# Altium PCB TAUV-Modem-Board.PcbDoc
Units mil, origin at the board's own origin, x right, y up, seen from the top; angles counter-clockwise.
Board outline 2755.91 x 2854.33 mil, 2 copper layers (Top Layer, Bottom Layer); 77 components, 54 nets, 230 pads, 47 vias.
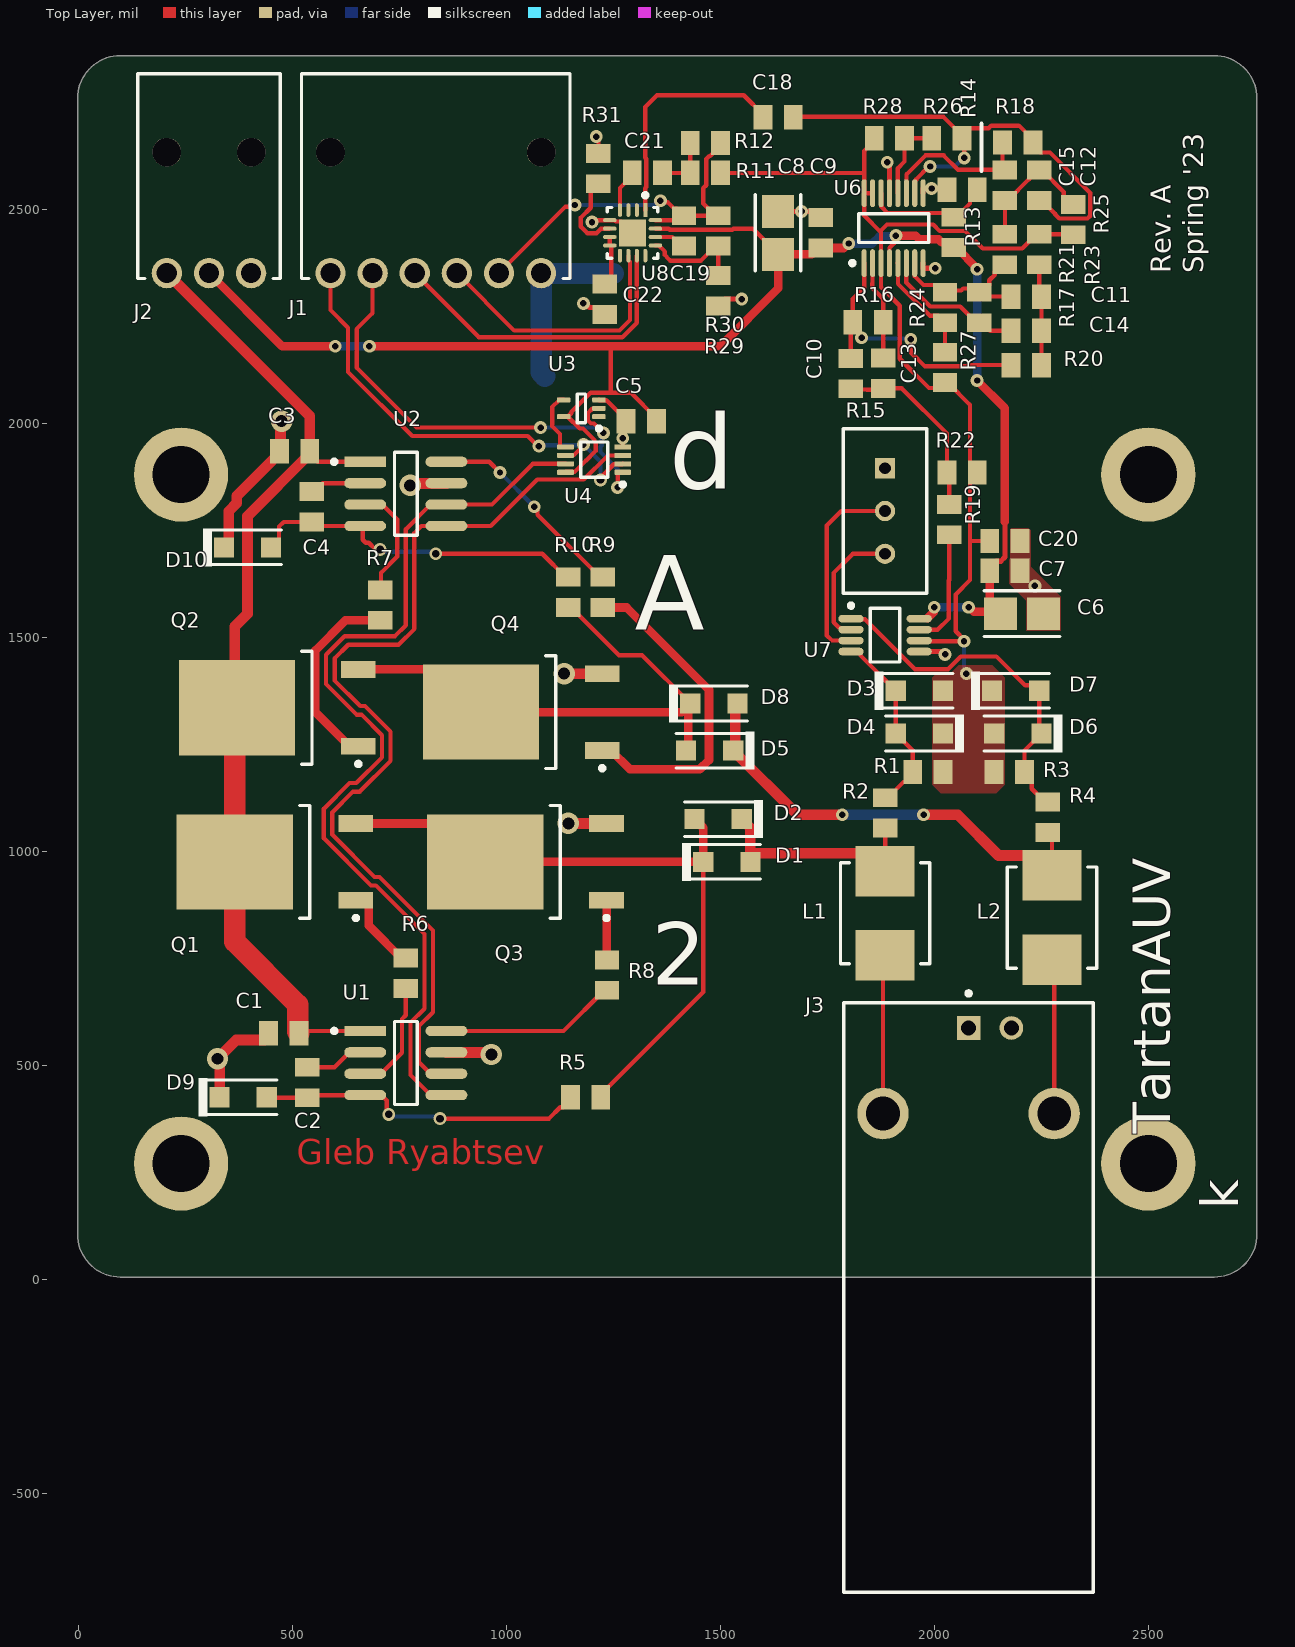
[diagram p0: Top Layer view]
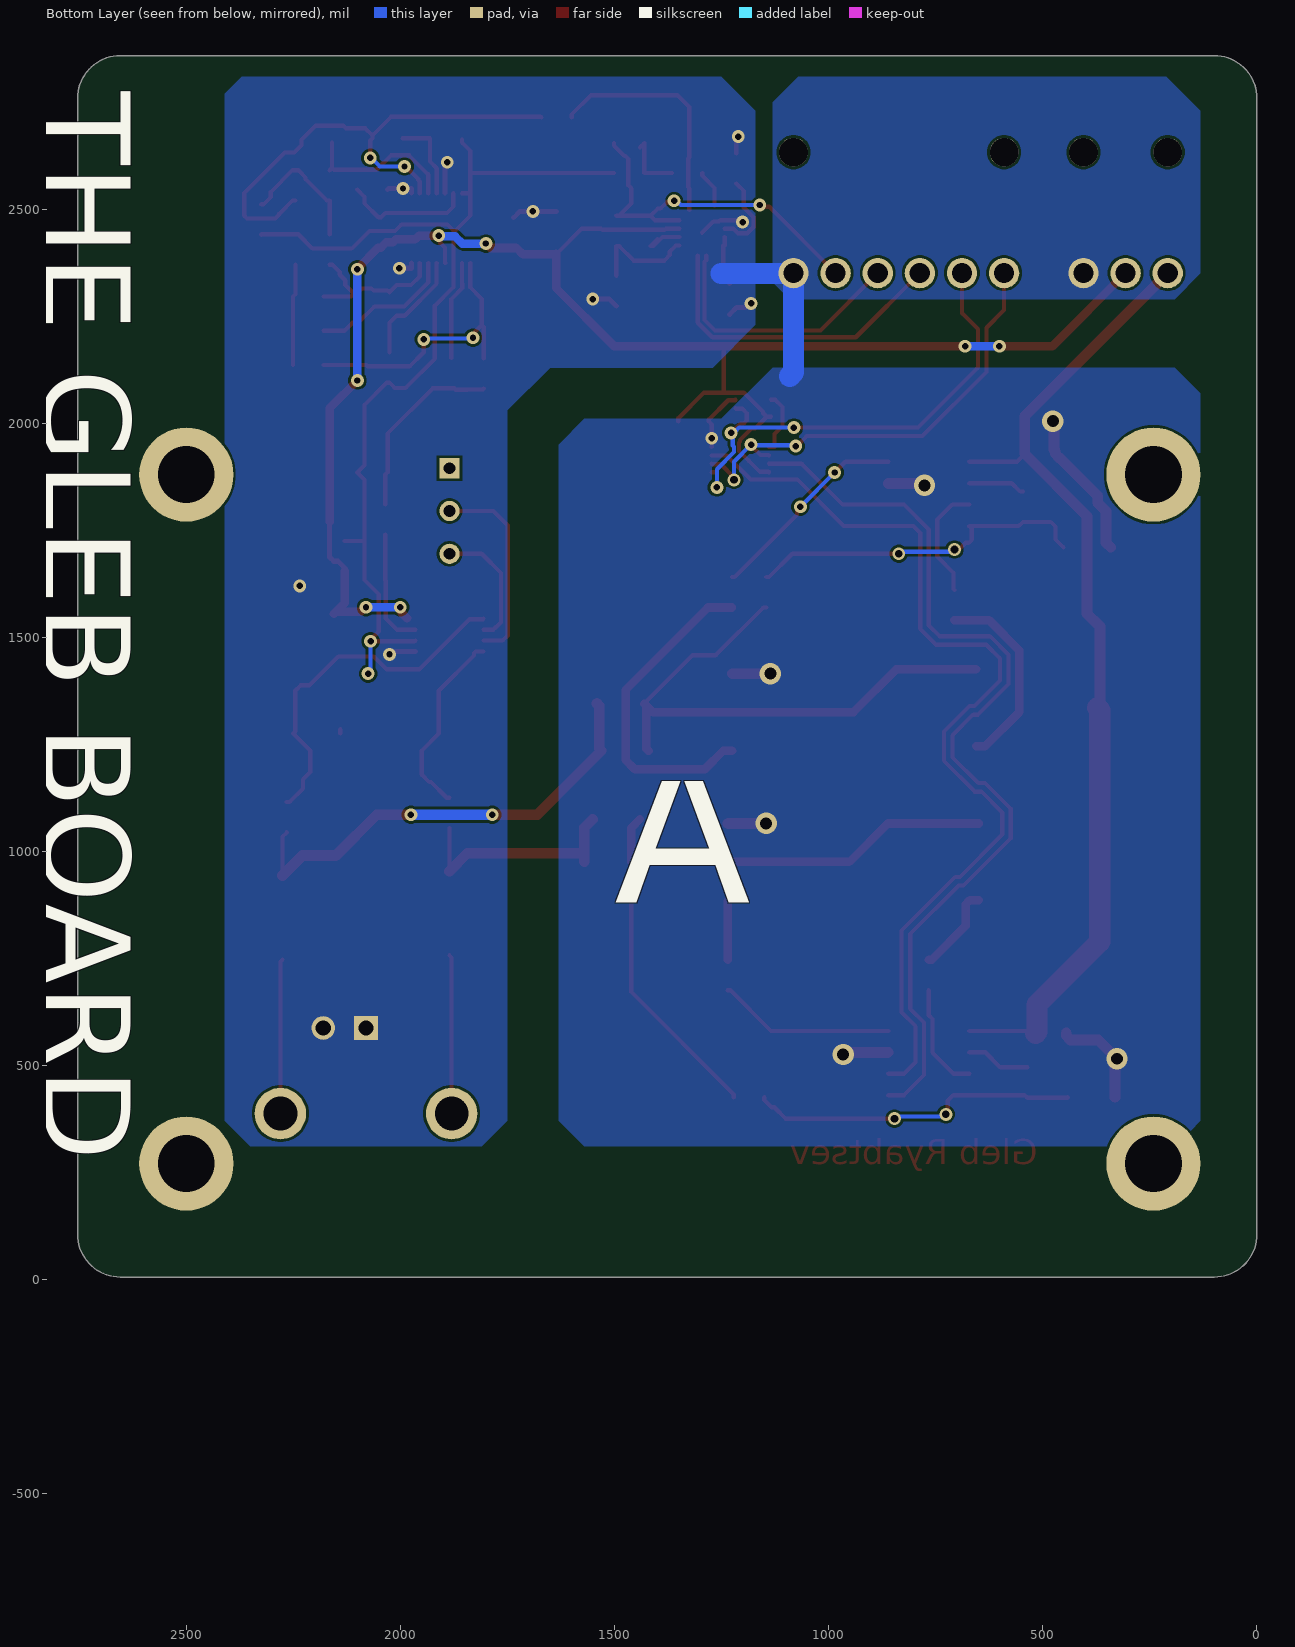
[diagram p1: Bottom Layer view, seen from below]

## Layer stack, top to bottom
Top Solder: solder mask 0.4, Solder Resist, Dk 3.5
Top Layer: signal copper 1.4
Dielectric 1: dielectric 12.6, FR-4, Dk 4.8
Bottom Layer: signal copper 1.4
Bottom Solder: solder mask 0.4, Solder Resist, Dk 3.5

## Board outline
-1.97,104.8 ccw(c98.03,104.8) 98.03,4.8 2653.94,4.8 ccw(c2653.94,104.8) 2753.94,104.8 2753.94,2759.13 ccw(c2653.94,2759.13) 2653.94,2859.13 98.03,2859.13 ccw(c98.03,2759.13) -1.97,2759.13

## Design rules (kind name [scope] priority, off if disabled: settings)
Clearance [All] p1: gap=6 ignorepadtopadclearanceinfootprint=TRUE except(0: Arc-Text Arc-Hole Track-Text Track-Hole SMDPad-Text SMDPad-Hole THPad-Text THPad-Hole Via-Text Via-Hole Fill-Text Fill-Hole Poly-Text Poly-Hole Region-Text Region-Hole Text-Text Text-Hole; 5: Arc-Arc Arc-Track Arc-SMDPad Track-Track Track-SMDPad SMDPad-SMDPad)
HoleSize [All] p1: absolutevalues=TRUE maxlimit=244.09 minlimit=7.87 maxpercent=80.000 minpercent=20.000
MinimumAnnularRing [All] p1: minimumring=6
MinimumSolderMaskSliver [All] p1: minsoldermaskwidth=2.95
PolygonConnect [All] p1: connectstyle=Direct reliefconductorwidth=10 reliefentries=4 polygonreliefangle="90 Angle" airgapwidth=10
RoomDefinition Main [InComponentClass('Main')] p1: confinementstyle=ConfineIn formatcopy=TRUE lockcomponents=FALSE outline -2250,-940 3840,-940 3840,3450 -2250,3450
RoomDefinition U_Tx [InComponentClass('U_Tx')] p2: confinementstyle=ConfineIn formatcopy=TRUE lockcomponents=FALSE outline -1020,-950 4120,-950 4120,3110 -1020,3110
RoomDefinition U_Rx [InComponentClass('U_Rx')] p3: confinementstyle=ConfineIn formatcopy=TRUE lockcomponents=FALSE outline -2060,-1170 4350,-1170 4350,3050 -2060,3050
RoutingVias [All] p1: holewidth=15 width=25 viastyle="Through Hole" minholewidth=12 minwidth=20 maxholewidth=28 maxwidth=50
SilkToSilkClearance [All] p1: silktosilkclearance=5
SilkToSolderMaskClearance [IsPad] p1: minsilkscreentomaskgap=5 clearancetoexposedcopper=TRUE
SolderMaskExpansion [All] p1: expansion=4 istentingtop=FALSE
Width [All] p1: maxlimit=50 minlimit=6 preferedwidth=10
26 further rules are at their usual default settings.

## Classes and differential pairs
component class U_Tx: C1 C2 C3 C4 C5 D9 D10 Q1 Q2 Q3 Q4 R5 R6 R7 R8 R9 R10 U1 U2 U3 U4
component class U_Rx: C6 C7 C8 C9 C10 C11 C12 C13 C14 C15 C18 C19 C20 C21 C22 R11 R12 R13 R14 R15 R16 R17 R18 R19 R20 R21 R22 R23 R24 R25 R26 R27 R28 R29 R30 R31 U6 U7 U8
component class Main: D1 D2 D3 D4 D5 D6 D7 D8 J1 J2 J3 L1 L2 R1 R2 R3 R4

## Components (designator, comment, footprint, x,y, rotation, side; value= is the part's Value field where it differs from the comment)
C1 "Capacitor" 0805 479.5,575 r0 top value=1u
C2 "Capacitor" 0805 535,459.5 r90 top value=1u
C3 "Capacitor" 0805 505,1935 r0 top value=1u
C4 "Capacitor" 0805 545,1805 r90 top value=1u
C5 "Capacitor" 0805 1315,2005 r0 top value=1u
C6 "C3216X5R1H106K160AB" FP-C3216-160-0_2-IPC_A 2205,1555 r0 top
C7 "Capacitor" 0805 2165,1655 r180 top value=0.1u
C8 "C3216X5R1H106K160AB" FP-C3216-160-0_2-IPC_A 1635,2445 r90 top
C9 "Capacitor" 0805 1735,2445 r270 top value=0.1u
C10 "Capacitor" 0805 1805,2116 r270 top value=330pF
C11 "Capacitor" 0805 2215,2296 r0 top value=300p
C12 "Capacitor" 0805 2245,2556 r90 top value=360p
C13 "Capacitor" 0805 1880.5,2117 r270 top value=330pF
C14 "Capacitor" 0805 2215,2216 r0 top value=300p
C15 "Capacitor" 0805 2165,2556 r270 top value=360p
C18 "Capacitor" 0805 1635,2715 r0 top value=19.6n
C19 "Capacitor" 0805 1415,2449.5 r90 top value=19.6n
C20 "Capacitor" 0805 2165,1725 r180 top value=0.1u
C21 "Capacitor" 0805 1329.5,2585 r0 top value=100n
C22 "Capacitor" 0805 1230,2290 r90 top value=100n
D1 "Diode" SOD-123F 1515,975 r0 top
D2 "Diode" SOD-123F 1495,1075 r180 top
D3 "Diode" SOD-123F 1965,1375 r0 top
D4 "Diode" SOD-123F 1965,1275 r180 top
D5 "Diode" SOD-123F 1475,1235 r180 top
D6 "Diode" SOD-123F 2195,1275 r180 top
D7 "Diode" SOD-123F 2190.12,1375 r0 top
D8 "Diode" SOD-123F 1485,1345 r0 top
D9 "Diode" SOD-123F 385,425 r0 top
D10 "Diode" SOD-123F 395.12,1710 r0 top
J1 "1053131106" "MOLEX 1053131106" 835,2595 r0 top
J2 "1053131103" "MOLEX 1053131103" 305,2595 r0 top
J3 "031-5540" FP-031-5540-MFG 2080,-43.03 r0 top
L1 "LQH55DN102M03L" FP-LQH55DN_03-MFG 1885,855 r90 top
L2 "LQH55DN102M03L" FP-LQH55DN_03-MFG 2275,845 r90 top
Q1 "IPD35N10S3L-26" INF-PG-TO252-3-11_M 459.49,975 r180 top
Q2 "IPD35N10S3L-26" INF-PG-TO252-3-11_M 465,1335 r180 top
Q3 "IPD35N10S3L-26" INF-PG-TO252-3-11_M 1045,975 r180 top
Q4 "IPD35N10S3L-26" INF-PG-TO252-3-11_M 1035,1325 r180 top
R1 "Resistor" 0805 1885,1089.5 r90 top value=100K
R2 "Resistor" 0805 1985,1185 r180 top value=1M
R3 "Resistor" 0805 2175,1185 r180 top value=1M
R4 "Resistor" 0805 2265,1079.5 r90 top value=100K
R5 "Resistor" 0805 1185,425 r0 top value=3
R6 "Resistor" 0805 765,715 r90 top value=10
R7 "Resistor" 0805 705,1575 r90 top value=10
R8 "Resistor" 0805 1235,710.5 r90 top value=10
R9 "Resistor" 0805 1225,1605 r90 top value=10
R10 "Resistor" 0805 1145,1605 r270 top value=3
R11 "Resistor" 0805 1465,2585 r0 top value=0
R12 "Resistor" 0805 1465,2655 r0 top value=0
R13 "Resistor" 0805 2045,2446 r270 top value=10k
R14 "Resistor" 0805 2065,2546 r0 top value=10k
R15 "3296W-1-503LF" FP-3296W-MFG 1885,1795 r180 top
R16 "Resistor" 0805 1845,2236 r180 top value=95.3k
R17 "Resistor" 0805 2105,2270.5 r90 top value=97.6k
R18 "Resistor" 0805 2195,2656 r0 top value=95.3k
R19 "Resistor" 0805 2035,1775 r90 top value=48.7k
R20 "Resistor" 0805 2215,2136 r0 top value=48.7k
R21 "Resistor" 0805 2165,2406 r90 top value=48.7k
R22 "Resistor" 0805 2065,1885 r180 top value=986
R23 "Resistor" 0805 2245,2406 r270 top value=1K
R24 "Resistor" 0805 2025,2270.5 r90 top value=13.3k
R25 "Resistor" 0805 2325,2476 r90 top value=976
R26 "Resistor" 0805 2029.5,2666 r0 top value=14.3k
R27 "Resistor" 0805 2025,2130.5 r90 top value=133
R28 "Resistor" 0805 1895,2666 r0 top value=143
R29 "Resistor" 0805 1495,2449.5 r90 top value=10k
R30 "Resistor" 0805 1495,2309.5 r90 top value=10k
R31 "Resistor" 0805 1215,2595 r270 top value=10k
U1 "MIC4604YM-TR" FP-SOICN-8LD-PL-1-IPC_A 765,505 r0 top
U2 "MIC4604YM-TR" FP-SOICN-8LD-PL-1-IPC_A 765,1835 r0 top
U3 "SN74AHC1G04DRLR" DRL0005A_M 1175,2035 r180 top
U4 "SN74LVC2G08DCUR" DCU0008A_M 1205,1915 r180 top
U6 "LTC6257CMS#PBF" LT-MS-16_N 1905,2456 r90 top value=48.7kR
U7 "AD8221ARMZ-R7" ADI-RM-8_L 1885,1505 r0 top
U8 "AD8338ACPZ-R7" FP-CP-16-22-IPC_C 1295,2445 r270 top value=48.7kR

## Footprints (in the part's own frame and the unit in brackets; to place one, negate y for a bottom-side part, rotate by r counter-clockwise, add the part's x,y. Pads: shape width x height; smd on the part's side, far side on the other; paste and mask are expansions set on the pad)
0805 [mil]
  rect 44x57 smd: 1(-35.5,0) 2(35.5,0)
  body extent 0,0 10,10, height 10
ADI-RM-8_L [mm] "SOP, 8-Leads, Body 3x3mm, Pitch 0.65mm, IPC High Density"
  oval 1.5x0.45 smd: 1(-2.025,0.975) 2(-2.025,0.325) 3(-2.025,-0.325) 4(-2.025,-0.975) 5(2.025,-0.975) 6(2.025,-0.325) 7(2.025,0.325) 8(2.025,0.975)
  silkscreen extent -2.15,-1.6 0.87,1.87, body extent -1.6,-1.6 1.6,1.6, height 1.1
DCU0008A_M [mm] "SOP, 8-Leads, Body 2.4x2.1mm, Pitch 0.5mm, IPC Low Density"
  rrect33% 1x0.3 smd: 1(-1.7,0.75) 2(-1.7,0.25) 3(-1.7,-0.25) 4(-1.7,-0.75) 5(1.7,-0.75) 6(1.7,-0.25) 7(1.7,0.25) 8(1.7,0.75)
  silkscreen extent -1.83,-1.05 0.8,1.6, body extent -1.56,-1 1.56,1, height 0.9
DRL0005A_M [mm] "SOT23, 5-Leads, Body 1.7x1.3mm, Pitch 0.5mm, IPC Low Density"
  rrect33% 0.8x0.3 smd: 1(-1.05,0.5) 2(-1.05,0) 3(-1.05,-0.5) 4(1.05,-0.5) 5(1.05,0.5)
  silkscreen extent -1.18,-0.85 0.25,1.32, body extent -0.65,-0.85 0.65,0.85, height 0.6
FP-031-5540-MFG [mm]
  rect 1.4x1.4 hole 0.9 paste-1000 mask+0: 1(0,16)
  round 1.4 hole 0.9 paste-1000 mask+0: 2(2.54,16)
  round 3.05 hole 2 paste-1000 mask+0: 3(-5.08,10.92) 4(5.08,10.92)
  silkscreen extent -7.4,-17.5 7.4,18.17, body extent -7.5,-17.6 7.5,17.6, height 0.25
FP-3296W-MFG [mm]
  rect 1.2x1.2 hole 0.7 paste-1000 mask+0: 1(0.005,-2.54)
  round 1.2 hole 0.7 paste-1000 mask+0: 2(0.005,0) 3(0.005,2.54)
  silkscreen extent -2.48,-4.89 2.48,4.89, body extent -2.58,-4.99 2.58,4.99, height 0.25
FP-C3216-160-0_2-IPC_A [mil]
  rect 76.93x75.05 smd paste+0 mask+0: 1(-50.24,0) 2(50.24,0)
  silkscreen extent -89,-53 89,53, body extent -108,-57 108,57, height 10
FP-CP-16-22-IPC_C [mm]
  rect 0.806x0.239 smd paste+0 mask+0: 1(-1.353,0.75)
  rrect100% 0.806x0.239 smd paste+0 mask+0: 2(-1.353,0.25) 3(-1.353,-0.25) 4(-1.353,-0.75) 9(1.353,-0.75) 10(1.353,-0.25) 11(1.353,0.25) 12(1.353,0.75)
  rrect100% 0.239x0.806 smd paste+0 mask+0: 5(-0.75,-1.353) 6(-0.25,-1.353) 7(0.25,-1.353) 8(0.75,-1.353) 13(0.75,1.353) 14(0.25,1.353) 15(-0.25,1.353) 16(-0.75,1.353)
  rect 1.6x1.6 smd paste-1000 mask+0: 17(0,0)
  silkscreen extent -2.36,-1.5 1.5,1.5, body extent -1.86,-1.86 1.86,1.86, height 0.25
FP-LQH55DN_03-MFG [mm]
  rect 3x3.5 smd paste+0 mask+0: 1(-2.5,0) 2(2.5,0)
  silkscreen extent -3,-2.65 3,2.65, body extent -4.1,-2.75 4.1,2.75, height 0.25
FP-SOICN-8LD-PL-1-IPC_A [mil]
  rect 97.79x23.89 smd paste+0 mask+0: 1(-94.92,75)
  rrect100% 97.79x23.89 smd paste+0 mask+0: 2(-94.92,25) 3(-94.92,-25) 4(-94.92,-75) 5(94.92,-75) 6(94.92,-25) 7(94.92,25) 8(94.92,75)
  silkscreen extent -172,-97 26,97, body extent -164,-117 164,117, height 10
INF-PG-TO252-3-11_M [mm] "DPAK, 3-Leads, Body 6.5x6.12mm, Pitch 2.28mm, IPC Low Density"
  rect 2.05x1 smd: 1(-4.8,2.28) 3(-4.8,-2.28)
  rect 6.9x5.65 smd: 2(2.4,0)
  silkscreen extent -4.93,-3.35 -1.45,3.45, body extent -2.05,-3.32 4.17,3.32, height 2.35
LT-MS-16_N [mm] "SOP, 16-Leads, Body 4.04x3.00mm, Pitch 0.50mm, IPC Medium Density"
  oval 1.65x0.3 smd: 1(-2.075,1.75) 2(-2.075,1.25) 3(-2.075,0.75) 4(-2.075,0.25) 5(-2.075,-0.25) 6(-2.075,-0.75) 7(-2.075,-1.25) 8(-2.075,-1.75) 9(2.075,-1.75) 10(2.075,-1.25) 11(2.075,-0.75) 12(2.075,-0.25) 13(2.075,0.25) 14(2.075,0.75) 15(2.075,1.25) 16(2.075,1.75)
  silkscreen extent -2.2,-2.08 0.85,2.57, body extent -1.55,-2.05 1.55,2.05, height 1.1
"MOLEX 1053131103" [mm] "Connector Header Through Hole, Right Angle 3 position, 2mm Pitch, 8.44x8.64 mm Body"
  round 1.8 hole 1.2: 1(-2.5,-6.2) 2(0,-6.2) 3(2.5,-6.2)
  round 1.7 hole 1.7: SH(-2.5,0.98) SH(2.5,0.98)
  silkscreen extent -4.22,-6.52 4.22,5.64, body extent -4.22,-6.52 4.22,5.64, height 6.64
"MOLEX 1053131106" [mm] "Connector Header Through Hole, Right Angle 6 position, 2mm Pitch, 15.94x8.64 mm Body"
  round 1.8 hole 1.2: 1(-6.25,-6.2) 2(-3.75,-6.2) 3(-1.25,-6.2) 4(1.25,-6.2) 5(3.75,-6.2) 6(6.25,-6.2)
  round 1.7 hole 1.7: SH(-6.25,0.98) SH(6.25,0.98)
  silkscreen extent -7.97,-6.52 7.97,5.64, body extent -7.97,-6.52 7.97,5.64, height 6.64
SOD-123F [mm]
  rect 1.2x1.2 smd paste-0.05 mask+0.051: 1(-1.4,0) 2(1.4,0)
  silkscreen extent -2.64,-1.12 2.01,1.12, body extent 0,0 0.25,0.25, height 0.25

## Part data
C6 C8: library part CMP-2000-06045-2, "Multilayer Ceramic Capacitors 10uF ±10% 50V X5R SMD 1206", Capacitance=10uF, Case Code (Imperial)=1206, Case Code (Metric)=3216, Dielectric=X5R, Dielectric Material=Ceramic, Max Operating Temperature=85°C, Min Operating Temperature=-55°C, Package Quantity=1, Tolerance=10%, Voltage=50V, Case/Package=1206, Construction=Flat, Depth=1.6mm, Height=1.6mm, Lead Free="Lead Free", Length=3.2mm, Mount="Surface Mount", Packaging="Tape and Reel", Radiation Hardening=No, REACH SVHC="No SVHC", Resistor Type=Ceramic, RoHS Compliant=Yes, Series=C, Termination=SMD/SMT, Thickness=0.071inch, Voltage Rating=50V, Voltage Rating (DC)=50V, Weight=0.000571oz, Width=0.063inch
J1: "CONN HEADER R/A 6POS 2.5MM", Insulation Color=Black, Manufacturer=Molex, Operating Temperature="-40°C ~ 105°C", Supplier Part Number 1=WM16897-ND, ComponentLink1Description=Datasheet, ComponentLink1URL=https://www.molex.com/pdm_docs/ps/PS-105300-100-001.pdf, ComponentLink2Description="DigiKey Link", ComponentLink2URL=https://www.digikey.com/en/products/detail/molex/1053131106/7693178, Connector Type=Header, Contact Finish - Mating=Tin, Contact Finish - Post=Tin, Contact Finish Thickness - Mating="59.0µin (1.50µm)", Contact Length - Post="0.126\" (3.20mm)", Contact Material=Brass, Contact Shape=Square, Contact Type="Male Pin", Fastening Type="Latch Holder", Features="Board Guide", Insulation Height="0.149\" (3.78mm)", Insulation Material="Liquid Crystal Polymer (LCP)", LastUpdated="8/11/2022 9:49:49 AM", Lifecycle Status=Active, Minimum Order=1, Mounting Type="Through Hole, Right Angle", Number of Positions=6, Number of Positions Loaded=All, Number of Rows=1, Packaging=Tray, Part Number=1053131106, Part Status=Active, PartId=145, Pitch - Mating="0.098\" (2.50mm)", Price=0.75, Row Spacing - Mating="-40°C ~ 105°C", Series="Nano-Fit 105313", Shrouding="Shrouded - 4 Wall", Style="Board to Cable/Wire", Supplier 1=DigiKey, Termination=Solder
J2: "CONN HEADER R/A 3POS 2.5MM", Insulation Color=Black, Manufacturer=Molex, Operating Temperature="-40°C ~ 105°C", Supplier Part Number 1=WM16894-ND, ComponentLink1Description=Datasheet, ComponentLink1URL=http://www.literature.molex.com/SQLImages/kelmscott/Molex/PDF_Images/987651-1223.PDF, ComponentLink2Description="DigiKey Link", ComponentLink2URL=http://digikey.com/product-detail/en/molex/1053131103/WM16894-ND/7693175, Connector Type=Header, Contact Finish - Mating=Tin, Contact Finish - Post=Tin, Contact Finish Thickness - Mating="59.0µin (1.50µm)", Contact Length - Post="0.126\" (3.20mm)", Contact Material=Brass, Contact Shape=Square, Contact Type="Male Pin", Fastening Type="Latch Holder", Features="Board Guide", Insulation Height="0.149\" (3.78mm)", Insulation Material="Liquid Crystal Polymer (LCP)", LastUpdated="8/11/2022 9:48:02 AM", Lifecycle Status=Active, Minimum Order=1, Mounting Type="Through Hole, Right Angle", Number of Positions=3, Number of Positions Loaded=All, Number of Rows=1, Packaging=Tray, Part Number=1053131103, Part Status=Active, PartId=142, Pitch - Mating="0.098\" (2.50mm)", Price=0.95, Row Spacing - Mating="-40°C ~ 105°C", Series="Nano-Fit 105313", Shrouding="Shrouded - 4 Wall", Style="Board to Cable/Wire", Supplier 1=DigiKey, Termination=Solder
J3: library part CMP-20040-000002-1, "CONN BNC RCPT R/A 50 OHM PCB", Dielectric Material=Polypropylene, Frequency=1GHz, Manufacturer="Amphenol RF", Package=0, Temperature="-55°C to +85°C", Temperature Range High=+85°C, Temperature Range Low=-55°C, Automotive=No, Category=Conn, ComponentLink2Description=Datasheet, ComponentLink2URL=https://www.amphenolrf.com/downloads/dl/file/id/2040/product/579/031_5540_customer_drawing.pdf, Conn Orientation="Right Angle", Contact Material=Gold,Nickel, Device Class L1=Connectors, Device Class L2="RF / Coaxial Connectors", Device Class L3=unset, Digikey Description="CONN BNC RCPT R/A 50 OHM PCB", Height=13.4mm, Impedance=50Ω, Is Female=yes, Lead Free=Yes, Manufacturer Part Number=031-5540, Number Of Contacts=2, Octopart=https://octopart.com/031-5540-amphenol+rf-49742301, Pitch=2.54mm, RoHS=TRUE
L1 L2: library part CMP-06042-004467-1, "Wire Wound Ferrite Inductor for Power Lines 1000μH ±20% 14.42Ω  0.15A 2220", Case Code (Imperial)=2220, Case Code (Metric)=5750, Current Rating=150mA, DC Resistance (DCR)=10.3R, Inductance=1mH, Max Operating Temperature=80°C, Min Operating Temperature=-40°C, Package Quantity=350, Resistor Type=Wirewound, Self Resonant Frequency=1.7MHz, Test Frequency=10kHz, Tolerance=20%, Case/Package=2220, Core Material=Ferrite, DC Current=150mA, Depth=5.3mm, Height=0.197inch, Height - Seated (Max)=0.198inch, Lead Free="Lead Free", Length=0.224inch, Max DC Current=150mA, Military Standard=Not, Mount="Surface Mount", Packaging="Tape and Reel", Radiation Hardening=No, Series Resistance=10.3R, Shielding=Unshielded, Termination=SMD/SMT, Weight=0.016932oz, Width=0.197inch
Q1 Q2 Q3 Q4: library part CMP-1138-00144-1, "OptiMOS-T Power-Transistor, 100 V VDS, 35 A ID, PG-TO252-3-11, Reel, Green", Manufacturer=Infineon, ComponentLink1Description="Manufacturer URL", ComponentLink1URL=http://www.infineon.com/, ComponentLink2Description=Datasheet, ComponentLink2URL=http://www.infineon.com/dgdl/IPD35N10S3L-26_DS_1_1.pdf?folderId=db3a3043156fd5730115c7d50620107c&fileId=db3a30431a5c32f2011a9085629c594b&location=en.Products.Automotive_ICs.Automotive_MOSFETs.Single__N-Channel_100V_MOSFETs.DATASHEET.IPD35N10S3L-26_DS_1_1.p, ComponentLink3Description="Package Specification", ComponentLink3URL=http://www.infineon.com/dgdl/BTS142_DS_13.pdf?folderId=db3a3043163797a6011667aa084c0e01&fileId=db3a3043163797a6011667ac98be0e02&location=en.Products.Automotive_ICs.Smart_High-_and_Low-Side_Switches.HITFET___TEMPFET__-_Smart_Low-Side_Switches.DATASHEET.BTS1, DatasheetVersion=Rev.1.1, Green=TRUE, Halogen-free=TRUE, ID (max)="35 A", IDpuls (max)="140 A", Mounting Technology="Surface Mount", PackageDescription="3-Pin Plastic (Green) Transistor Single Outline Package, 6.5 x 6.12 mm Body, 2.28 mm Pitch", PackageReference=PG-TO252-3-11, PackageVersion=Dec-06, Packing=Reel, PartNumber=IPD35N10S3L-26, Ptot (max)="71 W", QG="39 nC", RDS (on) (max) (@4.5V)="31.9 mOhm", RDS (on) (max) (@10V)="24 mOhm", RthJC (max)="2.1 K/W", Technology=OptiMOS-T, VDS (max)="100 V", VGS(th) (max)="2.4 V", VGS(th) (min)="1.2 V"
R15: library part CMP-07234-000043-1, "TRIMMER 50K OHM 0.5W PC PIN TOP", Color=Blue, Insulation Resistance=1GR, Manufacturer Series=3296, Max Operating Temperature=125°C, Max Power Dissipation=500mW, Min Operating Temperature=-55°C, Package Quantity=50, Resistance=50kR, Resistance Law=Linear, Resistance Tolerance=10%, Resistor Type=Cermet, Temperature Coefficient=100ppm/°C, Actuator Orientation=Vertical, Actuator Type=SCREW, Contact Plating=Tin, Depth=4.83mm, Height=0.395inch, Lead Free="Lead Free", Length=9.53mm, Military Standard=Not, Mount=Panel, Number of Pins=3, Number of Terminals/Pins=3, Number of Turns=25, Packaging=Rail/Tube, Power Rating=500mW, Radiation Hardening=No, REACH SVHC="No SVHC", RoHS Compliant=Yes, Series=3296, Taper=Linear, Technology=CERMET, Terminal Finish=Tin, Termination=Pin, Tolerance=10%, Type=Potentiometer, Weight=0.03oz, Width=9.53mm
R19 R20: "Fixed Resistor, Metal Glaze/thick Film, 0.125W, 48700ohm, 150V, 1% +/-Tol, 100ppm/Cel, Surface Mount, 0805", Case/Package=0805, Manufacturer=Panasonic, Manufacturer Part Number=ERJ-6ENF4872V, Max Operating Temperature=155°C, Min Operating Temperature=-55°C, Package Height=0.6mm, Package Length=2mm, Package Shape=Rectangular, Package Style=SMTMeter, Package Width=1.25mm, Power=125mW, Rated Temperature=70°C, Resistor Type="FIXED RESISTOR", Supplier Part Number=667-ERJ-6ENF4872V, Temperature Coefficient=100ppm/°C, Tolerance=1%, Working Voltage=150V, Category="Chip SMD Resistors", ComponentLink1Description=https://datasheet.ciiva.com:443/pdfs/VipMasterIC/IC/PANA/PANA-S-A0009889626/PANA-S-A0009889626-1.pdf?src-supplier=IHS+Markit, ComponentLink1URL=https://datasheet.ciiva.com:443/pdfs/VipMasterIC/IC/PANA/PANA-S-A0009889626/PANA-S-A0009889626-1.pdf?src-supplier=IHS+Markit, ComponentLink2Description=https://datasheet.ciiva.com/9189/aoa0000ce2-9189241.pdf?src-supplier=Avnet, ComponentLink2URL=https://datasheet.ciiva.com/9189/aoa0000ce2-9189241.pdf?src-supplier=Avnet, ComponentLink3Description=https://datasheet.ciiva.com/46420/1678782-46420077.pdf?src-supplier=Element14, ComponentLink3URL=https://datasheet.ciiva.com/46420/1678782-46420077.pdf?src-supplier=Element14, ComponentLink4Description=https://datasheet.ciiva.com/22668/1678782-22668698.pdf?src-supplier=Element14, ComponentLink4URL=https://datasheet.ciiva.com/22668/1678782-22668698.pdf?src-supplier=Element14, ComponentLink5Description=https://datasheet.ciiva.com/24063/aoa0000ce2-24063086.pdf?src-supplier=Mouser, ComponentLink5URL=https://datasheet.ciiva.com/24063/aoa0000ce2-24063086.pdf?src-supplier=Mouser, Construction=Rectangular, JESD-609 Code=e3, Mounting Technology="Surface Mount", Packaging="Tape and Reel", Pins=2, Pricing="1=0.11000, 10=0.08900, 50=0.08900, 100=0.03500, 1000=0.01600, 10000=0.01100 (USD)", Reach SVHC Compliant=Yes, Reference Standard=AEC-Q200, RoHS=Yes, RoHS Compliant=Yes, SimulationGenericComponent=True, Stock=62583, Supplier=Mouser, TC1=0, TC2=0, Technology="METAL GLAZE/THICK FILM", Terminal Finish=Nickel, Termination=Wraparound
U1 U2: library part CMP-06319-000039-1, "IC GATE DRVR HALF-BRIDGE 8SOIC", Case/Package=SOIC, Max Operating Temperature=125°C, Max Output Current=1A, Max Supply Voltage=16V, Min Operating Temperature=-40°C, Min Supply Voltage=5.5V, Nominal Supply Current=48uA, Operating Supply Voltage=12V, Package Quantity=2500, Channel Type=Independent, Fall Time=20ns, Lead Free="Lead Free", Mount="Surface Mount", Number of Drivers=2, Number of Outputs=1, Number of Pins=8, Packaging="Tape and Reel", Rise Time=20ns, RoHS Compliant=Yes, Series=-, Supply Current=48uA, Turn-Off Delay Time=75ns, Turn-On Delay Time=75ns
U3: library part CMP-0859-00797-3, "Single Inverter Gate, DRL0005A, LARGE T&R", F @ Nom Voltage(Max)(Mhz)=75, Generic Part Number=SN74AHC1G04, ICC @ Nom Voltage(Max)(mA)=0.01, Manufacturer="Texas Instruments", Operating Temperature Range(C)="-40 to 125", Rating=Catalog, tpd @ Nom Voltage(Max)(ns)=10.6,7.5, Voltage(Nom)(V)=3.3,5, 3-State Output=No, Bits(#)=1, DatasheetVersion=SCLS318S, Input Type=CMOS, Logic=Inverting, Output Drive (IOL/IOH)(Max)(mA)=50/-50, Output Type=CMOS, PackageReference=DRL0005A, Schmitt Trigger=No, Sub-Family="Inverting Buffer/Driver", Technology Family=AHC, VCC(Max)(V)=5.5, VCC(Min)(V)=2
U4: library part CMP-0859-00670-3, "Dual 2-Input Positive-AND Gate, DCU0008A, LARGE T&R", F @ Nom Voltage(Max)(Mhz)=150, Generic Part Number=SN74LVC2G08, ICC @ Nom Voltage(Max)(mA)=0.01, Manufacturer="Texas Instruments", Operating Temperature Range(C)="-40 to 125,-40 to 85", Rating=Catalog, tpd @ Nom Voltage(Max)(ns)=9.8,5.8,5.3,4.8, Voltage(Nom)(V)=1.8,2.5,3.3,5, 3-State Output=No, Bits(#)=2, DatasheetVersion=SCES198M, Gate Type=AND, Input Type=CMOS/TTL, Logic=True, Output Drive (IOL/IOH)(Max)(mA)=32/-32, Output Type=CMOS, PackageReference=DCU0008A, Schmitt Trigger=No, Sub-Family="AND Gate", Technology Family=LVC, VCC(Max)(V)=5.5, VCC(Min)(V)=1.65
U6: library part CMP-0359-00487-2, "Quad Channel, Power Efficient Operational Amplifier, RRIO, 6.5 MHz Typical GBW, 1.8 V/us Typical SR, 1.8 to 5.25 V, 16-Pin SOP (MS16), Commercial, Pb-Free", Case/Package=0805, Linear Technology Part Number=LTC6257, Manufacturer="Linear Technology", Manufacturer Part Number=ERJ-6ENF4872V, Max Operating Temperature=155°C, Min Operating Temperature=-55°C, Package Height=0.6mm, Package Length=2mm, Package Shape=Rectangular, Package Style=SMTMeter, Package Width=1.25mm, Power=125mW, Rated Temperature=70°C, Resistor Type="FIXED RESISTOR", Supplier Part Number=667-ERJ-6ENF4872V, Temperature Coefficient=100ppm/°C, Tolerance=1%, Working Voltage=150V, Category="Chip SMD Resistors", Channels (#)=4, ComponentLink1Description="Manufacturer URL", ComponentLink1URL=http://www.linear.com/, ComponentLink2Description=Datasheet, ComponentLink2URL=http://cds.linear.com/docs/en/datasheet/625567fb.pdf, ComponentLink3Description="Package Specification", ComponentLink3URL=http://cds.linear.com/docs/en/packaging/MSOP_16_05-08-1669.pdf, ComponentLink4Description=https://datasheet.ciiva.com:443/pdfs/VipMasterIC/IC/PANA/PANA-S-A0009889626/PANA-S-A0009889626-1.pdf?src-supplier=IHS+Markit, ComponentLink4URL=https://datasheet.ciiva.com:443/pdfs/VipMasterIC/IC/PANA/PANA-S-A0009889626/PANA-S-A0009889626-1.pdf?src-supplier=IHS+Markit, ComponentLink5Description=https://datasheet.ciiva.com/9189/aoa0000ce2-9189241.pdf?src-supplier=Avnet, ComponentLink5URL=https://datasheet.ciiva.com/9189/aoa0000ce2-9189241.pdf?src-supplier=Avnet, ComponentLink6Description=https://datasheet.ciiva.com/46420/1678782-46420077.pdf?src-supplier=Element14, ComponentLink6URL=https://datasheet.ciiva.com/46420/1678782-46420077.pdf?src-supplier=Element14, ComponentLink7Description=https://datasheet.ciiva.com/22668/1678782-22668698.pdf?src-supplier=Element14, ComponentLink7URL=https://datasheet.ciiva.com/22668/1678782-22668698.pdf?src-supplier=Element14, ComponentLink8Description=https://datasheet.ciiva.com/24063/aoa0000ce2-24063086.pdf?src-supplier=Mouser, ComponentLink8URL=https://datasheet.ciiva.com/24063/aoa0000ce2-24063086.pdf?src-supplier=Mouser, Construction=Rectangular, DatasheetVersion="Rev. B", GBW (MHz) Typical=6.5, Is (mA) Typical=0.065, JESD-609 Code=e3, Mounting Technology="Surface Mount", PackageDescription="16-Lead Plastic MSOP, Body 4.04 x 3.00 mm, Pitch 0.50 mm", PackageReference=LT-MS-16, PackageVersion="Rev Ã˜", Packaging="Tape and Reel", PartNumber=LTC6257CMS#PBF, Pins=2, Pricing="1=0.11000, 10=0.08900, 50=0.08900, 100=0.03500, 1000=0.01600, 10000=0.01100 (USD)", Reach SVHC Compliant=Yes, Reference Standard=AEC-Q200, RevisionNote="URLs updated", RoHS=Pb-Free, RoHS Compliant=Yes, SR (V/us) Typical=1.8, Stock=62583, Supplier=Mouser, Technology="METAL GLAZE/THICK FILM", Terminal Finish=Nickel, Termination=Wraparound, Type=VFB, Vos (mV) Typical=0.1, Vs Max (V)=5.25, Vs Min (V)=1.8
U7: library part CMP-0934-00067-1, "Precision Instrumentation Amplifier, 2 V/us, -40 to 125 degC, 8-Pin MSOP (RM-8), RoHS, Tape and Reel", Manufacturer="Analog Devices", Quiescent Current="0.9 mA Typ.", Temperature Range="-40 to 125 degC", -3dB Bandwidth@G="1=825 kHz", ComponentLink1Description="Manufacturer URL", ComponentLink1URL=http://www.analog.com/en/index.html, ComponentLink2Description=Datasheet, ComponentLink2URL=http://www.analog.com/static/imported-files/data_sheets/AD8221.pdf, ComponentLink3Description="Package Specification", ComponentLink3URL=http://www.analog.com/static/imported-files/packages/PKG_PDF/MSOP(RM)/RM_8.pdf, DatasheetVersion="Rev. C", Mounting Technology="Surface Mount", PackageDescription="8-Pin Mini Small Outline Package, Body 3 x 3 mm, Pitch 0.65 mm", PackageVersion=Aug-05, Packing="Tape and Reel", PartNumber=AD8221ARMZ-R7, RoHS=TRUE, Slew Rate@G="1=2 V/us Typ.", VIO="60 uV Max."
U8: library part CMP-09116-000032-1, "IC OPAMP VGA 1 CIRCUIT 16LFCSP", Case/Package=0805, Manufacturer="Analog Devices", Max Junction Temp=+150°C, Max Operating Temperature=155°C, Max Supply Voltage=5V, Min Operating Temperature=-55°C, Min Supply Voltage=3V, Nominal Supply Current=3-6mA, Output Current Per Channel=5mA, Package=CP-16-22, Package Height=0.6mm, Package Length=2mm, Package Shape=Rectangular, Package Style=SMTMeter, Package Width=1.25mm, Power=125mW, Rated Temperature=70°C, Resistor Type="FIXED RESISTOR", Supplier Part Number=667-ERJ-6ENF4872V, Temperature="-40°C to +85°C", Temperature Coefficient=100ppm/°C, Temperature Range High=+85°C, Temperature Range Low=-40°C, Tolerance=1%, Voltage Gain=80dB, Working Voltage=150V, Automotive=No, Bandwidth=18MHz, Category=IC, ComponentLink1Description=https://datasheet.ciiva.com:443/pdfs/VipMasterIC/IC/PANA/PANA-S-A0009889626/PANA-S-A0009889626-1.pdf?src-supplier=IHS+Markit, ComponentLink1URL=https://datasheet.ciiva.com:443/pdfs/VipMasterIC/IC/PANA/PANA-S-A0009889626/PANA-S-A0009889626-1.pdf?src-supplier=IHS+Markit, ComponentLink2Description=Datasheet, ComponentLink2URL=https://www.analog.com/media/en/technical-documentation/data-sheets/AD8338.pdf, ComponentLink3Description=https://datasheet.ciiva.com/9189/aoa0000ce2-9189241.pdf?src-supplier=Avnet, ComponentLink3URL=https://datasheet.ciiva.com/9189/aoa0000ce2-9189241.pdf?src-supplier=Avnet, ComponentLink4Description=https://datasheet.ciiva.com/46420/1678782-46420077.pdf?src-supplier=Element14, ComponentLink4URL=https://datasheet.ciiva.com/46420/1678782-46420077.pdf?src-supplier=Element14, ComponentLink5Description=https://datasheet.ciiva.com/22668/1678782-22668698.pdf?src-supplier=Element14, ComponentLink5URL=https://datasheet.ciiva.com/22668/1678782-22668698.pdf?src-supplier=Element14, ComponentLink6Description=https://datasheet.ciiva.com/24063/aoa0000ce2-24063086.pdf?src-supplier=Mouser, ComponentLink6URL=https://datasheet.ciiva.com/24063/aoa0000ce2-24063086.pdf?src-supplier=Mouser, Construction=Rectangular, Device Class L1="Integrated Circuits (ICs)", Device Class L2="Linear ICs", Device Class L3="Amplifiers - Op Amps", Digikey Description="IC OPAMP VGA 1 CIRCUIT 16LFCSP", Height=0.8mm, Ipc Land Pattern Name=QFN50P300X300X75-16, JESD-609 Code=e3, Lead Free=Yes, Manufacturer Part Number=AD8338ACPZ-R7, Mounting Technology="Surface Mount", Mouser Description="Special Purpose Amplifiers Ultra Low Pwr 18MHz SGL CH VGA", Number of Channels=1, Octopart=https://octopart.com/ad8338acpz-r7-analog+devices-21054770, Packaging="Tape and Reel", Pins=2, Pricing="1=0.11000, 10=0.08900, 50=0.08900, 100=0.03500, 1000=0.01600, 10000=0.01100 (USD)", Reach SVHC Compliant=Yes, Reference Standard=AEC-Q200, RoHS=TRUE, RoHS Compliant=Yes, Stock=62583, Supplier=Mouser, Technology="METAL GLAZE/THICK FILM", Terminal Finish=Nickel, Termination=Wraparound
C1 C2 C3 C4 C5 C7 C9 C10 C11 C12 C13 C14 C15 C18 C19 C20 C21 C22: SimulationGenericComponent=True
D1 D2 D3 D4 D5 D6 D7 D8 D9 D10: AF=1, BV=0, BV_MAX=1e99, CJO=0, CJP=0, CTA=0, CTP=0, EG=1.11, FC=0.5, FCS=0.5, FV_MAX=1e99, IBV=0.001, IKF=0, IKR=0, IS=1e-14, ISR=1e-14, JSW=0, JTUN=0, JTUNSW=0, KEG=1, KF=0, LEVEL=1, MJSW=0.33, N=1, NBV=1, NR=1, NS=1, NTUN=30, PHP=1, RS=0, SimulationGenericComponent=True, TCV=0, TLEV=0, TLEVC=0, TM1=0, TM2=0, TNOM=27, TPB=0, TPHP=0, TRS=0, TRS2=0, TT=0, TTT1=0, TTT2=0, VJ=1, XTI=3, XTITUN=3
R1 R2 R3 R4 R5 R6 R7 R8 R9 R10 R11 R12 R13 R14 R16 R17 R18 R21 R22 R23 R24 R25 R26 R27 R28 R29 R30 R31: SimulationGenericComponent=True, TC1=0, TC2=0

## Free pads (board coordinates)
  round 220 hole 133: 3(240,270) 3(240,1880) 3(2500,270) 3(2500,1880)

## Via types
v1: diameter 30, hole 15, Top Layer to Bottom Layer, 36 vias
v2: diameter 50, hole 28, Top Layer to Bottom Layer, 6 vias
v3: diameter 30, hole 18, Top Layer to Bottom Layer, 5 vias

## Nets (pads, with @x,y where several pads share a name; then routed paths per layer and width w, separated by ;. In a path a pad name is that pad's centre, name@x,y a point inside that pad or via, vN(x,y) a via of type N, cw(c..) or ccw(c..) an arc to the next point about the centre after c; other vN are vias at no path point)
AD8338_VREF: C19.2 J1.5 R12.2 R29.2 U8.16 | length 868
  Top Layer w10: J1.5 1137.91,2506.17 1156.17,2506.17 v1(1160,2510) ; U8.16 1404.53,2474.53 C19.2 ; v1(1360,2520) 1363.83,2516.17 1377.33,2516.17 1391.5,2502 1398,2502 C19.2 ; R29.2 R29.2@1488.5,2485 ; R12.2 1500.5,2648.5 1476.5,2624.5 1473.94,2624.5 1466.94,2617.49 1466.94,2556.38 1460,2549.44 1460,2513.5 R29.2@1488.5,2485 ; C19.2 R29.2@1488.5,2485
  Bottom Layer w10: v1(1160,2510) 1344.59,2510 1354.59,2520 v1(1360,2520)
BANDPASS_OUT: C12.1 C18.2 R18.2 R26.2 U6.10 | length 1210
  Top Layer w10: C18.2 1671.5,2716 2021.5,2716 R26.2@2065,2672.5 ; U6.10 1954.21,2564.76 1957.99,2568.54 1957.99,2570.86 1987.14,2600 v1(1990,2600) ; v1(2070,2620) 2070,2661 R26.2 R26.2@2065,2672.5 ; C12.1 2251.5,2520.5 2282.64,2489.36 2282.64,2487.8 2291.94,2478.5 2358.06,2478.5 2364.5,2484.94 2364.5,2538.06 2270.06,2632.5 2247.5,2632.5 2230.5,2649.5 R18.2 2230.5,2662.5 2197.5,2695.5 2132.94,2695.5 2126.94,2689.5 2082,2689.5 R26.2@2065,2672.5
  Bottom Layer w10: v1(1990,2600) 2047.57,2600 2067.57,2620 v1(2070,2620)
GND: C1.1 C3.1 C5.1 C6.2 C7.1 C8.2 C9.1 C20.1 C22.1 D9.1 D10.1 J1.6 J2.3 J3.1 J3.2 Q3.3 Q4.3 R14.1 R30.1 R31.1 U1.7 U2.7 U3.3 U4.4 U6.8 U6.9 U6.13 U7.5 U8.5 U8.17 | length 2150.9
  Top Layer w10: v1(1200,2470) 1204.06,2470 1208.59,2474.53 U8.5 1252.31,2474.53 1255.34,2471.5 1268.5,2471.5 U8.17 ; v1(1210,2670) 1215,2665 R31.1 ; U3.3 1217.24,2053.78 1233.63,2053.78 1279.5,2007.91 C5.1 1271.93,1997.43 v1(1271.93,1965) U4.4
  Top Layer w12: v1(1180,2280) 1184.87,2280 1194.37,2270.5 1214,2270.5 C22.1 ; R30.1 1511,2290 v1(1550,2290) ; C8.2 v1(1690,2495.24) 1720.26,2495.24 C9.1 ; v1(1890,2610) 1890,2605.13 1895.16,2599.97 U6.13 ; U7.5 2018.52,1466.61 v1(2025.13,1460) ; U6.8 1973.9,2362.18 1973.99,2362.08 v1(2002.11,2362.08) ; U6.9 1973.9,2548.45 1973.99,2548.55 2026.95,2548.55 R14.1
  Top Layer w25: D9.1 329.88,510.12 v2(325,515) 369,559 434.5,559 444,568.5 C1.1 ; D10.1 351,1721 351,1794.63 370,1813.62 370,1830 459,1919 460,1919 469.5,1928.5 C3.1 472.25,1937.75 472.25,2002.25 v2(475,2005) ; v2(775,1855) 779.45,1859.45 859.37,1859.45 U2.7 ; U1.7 860.48,529.45 960.55,529.45 v2(965,525) ; v2(1135,1415) 1135.12,1414.88 1223.86,1414.88 Q4.3 ; v2(1145,1065) 1145.12,1064.88 1233.86,1064.88 Q3.3
  Bottom Layer w50: 1090,2110 1081.06,2118.94 J1.6 1081.97,2350 1250,2350
  other v1: 2235,1620 1993.55,2548.55
NetC2_1: C2.1 D9.2 R5.1 U1.4 | length 775.9
  Top Layer w10: D9.2 441.12,424 C2.1 541,430 U1.4 707.82,430 720.63,417.2 720.63,389.37 v3(725,385) ; v3(845,375) 1099.5,375 1126,401.5 1132.5,401.5 1149.5,418.5 R5.1
  Bottom Layer w10: v3(725,385) 730,380 840,380 v3(845,375)
NetC2_2: C2.2 U1.2 | length 149.6
  Top Layer w10: C2.2 598.13,495 633.13,530 U1.2
NetC4_1: C4.1 D10.2 R10.1 U2.4 | length 817.6
  Top Layer w10: D10.2 468.86,1728.62 468.86,1758.74 479.62,1769.5 C4.1 554.5,1760 U2.4 670.08,1759.43 664.23,1753.58 664.23,1727.87 671.31,1720.8 678.37,1720.8 694.18,1705 v3(705,1705) ; v3(835,1695) 1084,1695 1138.5,1640.5 R10.1
  Bottom Layer w10: v3(705,1705) 710,1700 830,1700 v3(835,1695)
NetC4_2: C4.2 U2.2 | length 133.2
  Top Layer w10: C4.2 551.5,1840.5 571,1860 U2.2
NetC10_1: C10.1 R16.2 R20.1 U6.1 | length 669.8
  Top Layer w10: C10.1 1805,2225 R16.2@1809.5,2229.5 ; v1(1830,2200) 1826.5,2203.5 1826.5,2212.5 R16.2@1809.5,2229.5 ; U6.1 1836.1,2317.1 1809.5,2290.5 R16.2 R16.2@1809.5,2229.5 ; v1(1945.06,2196) 1945.06,2165.94 1978,2133 2075.72,2133 2078.72,2136 R20.1
  Bottom Layer w10: v1(1830,2200) 1832,2198 1943.06,2198 v1(1945.06,2196)
NetC10_2: C10.2 C13.2 R19.2 R22.2 | length 437.9
  Top Layer w10: C10.2 1806.64,2078.86 1842.64,2078.86 1842.86,2078.64 1871.14,2078.64 1874,2081.5 1924,2081.5 2029.5,1976 R22.2 2035,1879.5 R19.2
NetC11_1: C11.1 R17.2 R21.1 R24.2 U6.7 | length 380.1
  Top Layer w10: U6.7 1954.56,2373.96 1954.56,2343.16 1974.72,2323 2008,2323 R24.2 2029.14,2310.14 2062.64,2310.14 2067.36,2314.86 2089.64,2314.86 2098.5,2306 R17.2 ; R21.1 2158.5,2370.5 2141.5,2353.5 2141.5,2347 2128.5,2334 2128.5,2323 2111.5,2306 R17.2 ; C11.1 2115,2296 R17.2
NetC11_2: C11.2 C14.2 R20.2 R23.2 | length 236.8
  Top Layer w10: R23.2 2245,2301.5 C11.2 C14.2 R20.2
NetC12_2: C12.2 C15.2 R21.2 R25.2 | length 311
  Top Layer w10: R21.2 C15.2 2171.5,2520.5 2221.5,2570.5 2221.5,2574.5 2238.5,2591.5 2251.5,2591.5 2302.39,2540.61 2302.39,2528.5 2319.39,2511.5 R25.2
NetC13_1: C13.1 R16.1 U6.2 | length 232.7
  Top Layer w10: U6.2 1855.44,2373.96 1855.44,2326.9 1855,2326.45 1855,2316 1880.5,2290.5 R16.1 C13.1
NetC14_1: C14.1 R17.1 U6.6 | length 337
  Top Layer w10: U6.6 1934.53,2329.1 1990.63,2273 2060.5,2273 2098.5,2235 R17.1 2111.5,2235 2130.5,2216 C14.1
NetC15_1: C15.1 R18.1 U6.11 | length 369.6
  Top Layer w10: U6.11 1934.87,2538.04 1934.87,2581.64 1979.23,2626 2021.77,2626 2055.27,2592.5 2155,2592.5 C15.1@2159.5,2597 ; R18.1 C15.1@2159.5,2597 ; C15.1 C15.1@2159.5,2597
NetC18_1: C18.1 U8.1 | length 554.2
  Top Layer w10: U8.1 1324.53,2549.47 1327,2551.94 1327,2618.06 1324.53,2620.53 1324.53,2738.88 1352.15,2766.5 1554.5,2766.5 1599.5,2721.5 C18.1
NetC19_1: C19.1 U8.14 | length 98.8
  Top Layer w10: U8.14 1387.34,2435.16 1408.5,2414 C19.1 C19.1@1398.5,2430.5
NetC21_1: C21.1 U8.4 | length 87.7
  Top Layer w10: U8.4@1265.47,2509.14 1265.47,2549.97 1294,2578.5 C21.1
NetC21_2: C21.2 R11.1 R12.1 | length 148.6
  Top Layer w10: C21.2 R11.1 R12.1 R12.1@1439.5,2645
NetC22_2: C22.2 U8.7 U8.8 | length 119
  Top Layer w10: C22.2 1245,2340.5 1245,2415.18 1244.71,2415.47 U8.8 U8.7
NetD3_1: D3.1 D4.2 R1.2 R2.2 U7.4 | length 445.4
  Top Layer w10: U7.4 1823.86,1466.61 1827.42,1463.05 1827.42,1457.46 D3.1 D4.2 1949.5,1235.38 R2.2 1949.5,1178.5 1932.5,1161.5 1928,1161.5 1891.5,1125 R1.2
NetD6_1: D6.1 D7.2 R3.1 R4.2 U7.1 | length 839.4
  Top Layer w10: U7.1 1806.75,1541.91 1838.09,1541.91 1955,1425 2031.77,1425 2061.77,1455 2145,1455 2212.47,1387.53 2232.71,1387.53 D7.2 2245.24,1279.88 D6.1 2210.5,1235.38 R3.1 2227.5,1168 2227.5,1146 2258.5,1115 R4.2
NetJ3_3: J3.3 L1.1 | length 371.8
  Top Layer w10: J3.3 1880,751.57 L1.1
NetJ3_4: J3.4 L2.1 | length 361.8
  Top Layer w10: L2.1 2280,741.57 J3.4
NetQ1_1: Q1.1 R6.2 | length 203.4
  Top Layer w20: Q1.1 669.13,885.24 678.82,875.55 678.82,825.68 758.5,746 R6.2@765,746
NetQ2_1: Q2.1 R7.1 | length 458.2
  Top Layer w20: Q2.1 633.31,1245.24 553.62,1324.92 553.62,1469.3 623.82,1539.5 R7.1
NetQ3_1: Q3.1 R8.2 | length 139.7
  Top Layer w20: Q3.1 1235,884.21 R8.2
NetQ4_1: Q4.1 R9.1 | length 768.8
  Top Layer w20: Q4.1 1244.65,1235.24 1288.5,1191.38 1451.79,1191.38 1473.5,1213.09 1473.5,1376.91 1280.91,1569.5 R9.1
NetR13_1: R13.1 R14.2 U6.14 | length 302.1
  Top Layer w10: U6.14 1875.82,2537.35 1875.82,2506.55 1890.87,2491.5 2035,2491.5 R13.1 2051.5,2481.5 2083.5,2513.5 2083.5,2529 R14.2
NetR15_2: R15.2 U7.3 | length 468.5
  Top Layer w10: U7.3 1760.75,1492.2 1748.75,1504.2 1748.75,1761.1 1782.65,1795 R15.2
NetR15_3: R15.3 U7.2 | length 301.3
  Top Layer w10: U7.2 1782.52,1517.8 1776.79,1523.53 1776.38,1523.53 1764.75,1535.16 1764.75,1650.12 1809.63,1695 R15.3
NetR19_1: R19.1 U7.7 | length 276.3
  Top Layer w10: U7.7 1965.07,1517.45 2007.45,1517.45 2034,1544 2034,1632.75 2035,1633.75 R19.1
NetR24_1: R24.1 R27.2 U6.5 | length 265.1
  Top Layer w10: U6.5 1915.19,2373.96 1915.19,2325.81 1989.64,2251.36 2008.64,2251.36 R24.1 R27.2
NetR26_1: R26.1 R28.2 U6.12 | length 198.3
  Top Layer w10: U6.12 1914.84,2595.8 1930.5,2611.46 R28.2 R26.1
NetR29_1: R29.1 R30.2 U8.13 | length 249.4
  Top Layer w10: U8.13 1355.9,2415.47 1370.34,2401.04 1370.34,2393.31 1375.5,2388.15 1375.5,2387.44 1382.94,2380 1454.5,2380 1488.5,2414 R29.1 R30.2
NetR31_2: R31.2 U8.6 | length 196.3
  Top Layer w10: R31.2 1214.03,2559.5 1197.03,2542.5 1197.03,2503.8 1174,2480.77 1174,2459.23 1189.23,2444 1210.77,2444 1221.32,2454.55 1241.44,2454.55 U8.6
NetU3_4: U3.4 U4.5 | length 146.8
  Top Layer w10: U3.4 1123.82,2054.69 1106.91,2037.78 1106.91,1993.27 1125.33,1974.85 1125.33,1945.43 1126.24,1944.53 U4.5
Piezo_Matched+: D1.2 D2.1 L1.2 R1.1 | length 541
  Top Layer w10: L1.2 R1.1
  Top Layer w25: D2.1 1570.12,1055 D1.2@1570.12,995 ; D1.2 D1.2@1570.12,995 ; L1.2 1843.43,995 D1.2@1570.12,995
Piezo_Matched-: D5.1 D8.2 L2.2 R4.1 | length 1084.5
  Top Layer w10: R4.1 2275,1034 L2.2
  Top Layer w25: D8.2 1535.12,1340 1535.12,1240 D5.1 1680.12,1085 v1(1785,1085) ; v1(1975,1085) 2055,1085 2150.02,989.98 2228.44,989.98 L2.2
  Bottom Layer w25: v1(1785,1085) v1(1975,1085)
Rx_Out+: J1.3 U8.11 | length 752.1
  Top Layer w10: J1.3 935.69,2201 1271,2201 1304.84,2234.84 U8.11
Rx_Out-: J1.4 U8.10 | length 622
  Top Layer w10: J1.4 1018.12,2217 1264.37,2217 1288.84,2241.47 1288.84,2377.47 1285.16,2381.15 U8.10
Teensy_Tx: J1.2 U3.2 U4.1 | length 1166.2
  Top Layer w10: J1.2 687.36,2257.36 650,2220 650,2130 790,1990 v1(1080,1990) ; U3.2 1215.43,2034.09 1200.46,2034.09 1190.59,2024.22 1190.59,2006.41 1197.59,1999.41 1204.71,1999.41 v1(1226.76,1977.36) ; v1(1260,1850) 1260,1884.57 1260.91,1885.47 U4.1
  Bottom Layer w10: v1(1080,1990) 1208.13,1990 1216.95,1981.18 1222.94,1981.18 v1(1226.76,1977.36) 1222.94,1973.53 1222.94,1948.12 1220,1945.18 1220,1932.63 1260,1892.63 v1(1260,1850)
Teensy_Tx_En: J1.1 U4.2 U4.6 | length 1094.3
  Top Layer w10: J1.1 588.94,2264.46 630,2223.39 630,2120 780,1970 1049.81,1970 1073.16,1946.65 v1(1075.96,1946.65) ; U4.6 1138.98,1925.75 1157.88,1925.75 1180,1947.87 v1(1180,1950) ; v3(1219.89,1867.78) 1219.89,1873.44 1250.7,1904.25 1271.02,1904.25 U4.2
  Bottom Layer w10: v1(1075.96,1946.65) 1077.63,1948.32 1178.32,1948.32 v1(1180,1950) 1219.89,1910.11 v3(1219.89,1867.78)
Tx_Fwd: U1.5 U2.6 U4.7 | length 2205
  Top Layer w10: U1.5 822.97,430 776.02,476.95 776.02,599.45 808.5,631.92 808.5,806.45 695.03,919.92 683.77,919.92 573.11,1030.58 573.11,1098.95 633.31,1159.14 649.14,1159.14 709.33,1219.34 709.33,1271.13 661.32,1319.14 650.06,1319.14 578.62,1390.58 578.62,1458.95 622.18,1502.5 739.71,1502.5 765,1527.79 765,1752.03 822.97,1810 U2.6 966.57,1810 1061.73,1905.16 U4.7
Tx_Hi_L_Gate: R6.1 U1.3 | length 256
  Top Layer w10: U1.3 707.03,480 756.02,529 756.02,607.73 765,616.7 R6.1@765,675
Tx_Hi_R_Gate: R7.2 U2.3 | length 270.5
  Top Layer w10: U2.3 710,1810 745,1775 745,1688.43 707.03,1650.46 707.03,1612.53 R7.2
Tx_Lo_L_Gate: R8.1 U1.8 | length 414.4
  Top Layer w10: U1.8 1133.5,580 1228.5,675 R8.1
Tx_Lo_R_Gate: R9.2 U2.8 | length 483.2
  Top Layer w10: U2.8 960,1910 v1(985,1885) ; v1(1065,1805) 1072.65,1797.35 1072.65,1786.35 1218.5,1640.5 R9.2
  Bottom Layer w10: v1(985,1885) v1(1065,1805)
Tx_Out+: D1.1 D2.2 Q1.3 Q3.2 R5.2 | length 1606
  Top Layer w10: R5.2 1220.5,431.5 1459.88,670.88 D1.1
  Top Layer w20: Q1.3 860.75,1064.76 Q3.2 D1.1 1459.88,1055 D2.2
Tx_Out-: D5.2 D8.1 Q2.3 Q4.2 R10.2 | length 1310.5
  Top Layer w10: R10.2 1151.5,1569.5 1262.94,1458.06 1316.82,1458.06 D8.1
  Top Layer w20: Q2.3 840.75,1424.76 Q4.2 1409.88,1325 D8.1@1424.88,1340 ; D5.2 1424.88,1240 D8.1@1424.88,1340 ; D8.1 D8.1@1424.88,1340
Tx_Rev: U1.6 U2.5 U4.3 | length 2263.8
  Top Layer w10: U1.6 822.97,480 796.02,506.95 796.02,591.16 828.5,623.64 828.5,814.74 703.32,939.92 692.05,939.92 593.11,1038.87 593.11,1090.66 641.59,1139.14 657.42,1139.14 729.33,1211.05 729.33,1279.42 669.61,1339.14 658.35,1339.14 598.62,1398.87 598.62,1450.66 630.46,1482.5 748,1482.5 785,1519.5 785,1743.75 801.25,1760 U2.5 963.43,1760 1072,1868.57 1180.97,1868.57 1237.24,1924.84 U4.3
V5+: C5.2 C6.1 C7.2 C8.1 C9.2 J2.2 R13.2 U3.5 U4.8 U6.4 U7.8 U8.15 | length 4065.9
  Top Layer w10: U3.5 U3.5@1143.5,2015.32 ; U4.8 1138.98,1886.38 1159.3,1886.38 1185,1912.08 1185.32,1912.08 1208.5,1935.27 1208.5,1954.73 1206,1957.23 1206,1960.77 1179.18,1987.59 1171.23,1987.59 U3.5@1143.5,2015.32 ; 1240,2180 1243.79,2176.21 1243.79,2071.59 ; U8.15 1379.1,2454.84 1381.94,2452 1528.06,2452 1530.9,2454.84 1575.86,2454.84 C8.1@1635,2395.7 ; C5.2 1350.5,2011.5 1290.41,2071.59 1243.79,2071.59 ; U6.4 1895.5,2374.65 1895.5,2410.09 1906.34,2420.93 1906.34,2429.25 1906.92,2429.84 v1@1910.16,2429.84 ; U3.5@1143.5,2015.32 1151.56,2023.37 1151.56,2025.97 1197.18,2071.59 1243.79,2071.59
  Top Layer w12: C7.2 2129.5,1661.5 2145.5,1677.5 2155.26,1677.5 2165,1687.24 2165,1770
  Top Layer w20: J2.2 475.91,2180 v1(600,2180) ; v1(680,2180) 1240,2180 1500,2180 1635,2315 C8.1 ; C8.1@1635,2395.7 C8.1 ; v1(1800,2420) 1798.65,2420 1788.15,2409.5 C9.2 1728.5,2409.5 1713.76,2394.76 C8.1 ; v1(1910.16,2438.49) 1956.18,2438.49 1965.16,2429.5 2010.01,2429.5 2017.01,2422.5 2033,2422.5 R13.2 2051.5,2410.5 2100,2362 v1(2100,2360) ; U7.8@1984.25,1544.53 1998.09,1558.36 1998.09,1568.09 v1(2000,1570) ; v1(2080,1570) 2082.71,1570 2092.71,1560 C6.1@2149.76,1560 ; v1(2100,2100) 2165,2035 2165,1770 ; C7.2 2129.5,1580.26 C6.1@2149.76,1560 ; C6.1 C6.1@2149.76,1560
  Bottom Layer w20: v1(600,2180) v1(680,2180) ; v1(1800,2420) 1855.16,2420 1871.74,2436.58 1908.25,2436.58 v1(1910.16,2438.49) ; v1(2000,1570) v1(2080,1570) ; v1(2100,2100) v1(2100,2360)
VRef+: C20.2 D3.2 D4.1 D6.2 D7.1 R2.1 R3.2 R11.2 R22.1 R23.1 R25.1 R27.1 R28.1 U6.3 U6.15 U6.16 U7.6 | length 2450.7
  Top Layer w10: R11.2 1834.2,2585 1836.1,2586.9 ; U6.15 U6.16 ; R28.1@1855.79,2662.29 1855.79,2655.79 1836.1,2636.1 1836.1,2586.9 ; 1873.23,2448.22 1889.5,2464.49 1997.37,2464.49 2012.36,2449.5 2072.06,2449.5 2113.06,2408.5 2205.5,2408.5 2238.5,2441.5 R23.1 2324,2441.5 R25.1 ; U7.6 1966.16,1490.77 v1(2069.41,1490.77) 2069.41,1494.71 2050,1514.13 2050,1600 2083.5,1633.5 2083.5,1725 ; C20.2 2083.5,1725 ; D6.2@2139.5,1275 D6.2@2139.5,1284.62 ; D6.2 2139.88,1284.24 D6.2@2139.5,1284.62 ; D6.2@2139.88,1285 D6.2@2139.5,1284.62 ; U6.16 1836.1,2485.35 1875.47,2445.98 U6.3 1875.47,2318.15 1919.06,2274.57 1919.06,2150.94 1987.36,2082.64 2012.64,2082.64 R27.1 2031.5,2095 2083.5,2043 2083.5,1902 R22.1 2083.5,1868 2083.5,1725 ; U6.16 1836.1,2586.9
  Bottom Layer w10: v1@2069.41,1424.65 v1(2069.41,1490.77)
  other v1: 2075,1415
VTx+: C1.2 C3.2 J2.1 Q1.2 Q2.2 U1.1 U2.1 | length 2348
  Top Layer w10: C1.2 520,580 U1.1 ; C3.2@540.5,1928.5 559,1910 U2.1
  Top Layer w25: J2.1 540.5,2016.98 540.5,1928.5 395,1783 395,1555 365,1525 365,1340.51 Q2.2
  Top Layer w50: Q2.2 365,1329.49 Q1.2 365,788.78 512,641.78 512,578 C1.2
pads on no net: J1.SH J2.SH R15.1 U3.1 U8.2 U8.3 U8.9 U8.12

## Polygon pours and split planes (outlines as drawn)
VRef+ on Top Layer "VREF+_L01_P004" (solid, pour order 4): 1995,1405 2025,1435 2135,1435 2165,1405 2165,1155 2145,1135 2015,1135 1995,1155
GND on Top Layer "GND_L01_P010" (solid, pour order 10): 2180,1755 2175,1750 2175,1625 2215,1585 2215,1515 2295,1515 2295,1595 2225,1665 2225,1750 2220,1755
GND on Bottom Layer "GND_L02_P008" (solid, pour order 8): 1630,310 1630,1950 1570,2010 1250,2010 1130,2130 190,2130 130,2070 130,370 190,310
GND on Bottom Layer "GND_L02_P006" (solid, pour order 6): 1810,310 1750,370 1750,2030 1650,2130 1270,2130 1170,2230 1170,2730 1250,2810 2370,2810 2410,2770 2410,370 2350,310
GND on Bottom Layer "GND_L02_P009" (solid, pour order 9): 1090,2290 1130,2330 1130,2750 1070,2810 210,2810 130,2730 130,2350 190,2290

## Other copper
Top Layer:
  text "Gleb Ryabtsev" at 510,248.43 h100
Bottom Layer:
  pour cut-out: 760,230 820,170 760,170

## Silkscreen, mask and mechanical layers (free items; w line width, h text height)
Top Overlay:
  lines w10: 2110,2590 2110,2700
  text "Rev. A" at 2569,2350 h80 r90
  text "Spring '23" at 2644.46,2350 h80 r90
  text "d" at 1380,1790 h300
  text "A" at 1300,1460 h300
  text "2" at 1340,640 h250
  text "TartanAUV" at 2580,340 h150 r90
  text "k" at 2740,162.91 h150 r90
Bottom Overlay:
  text "THE GLEB BOARD" at 2901.84,2774.77 h350 r90
  text "A" at 1500,690 h1000
Top Solder:
  text "Gleb Ryabtsev" at 510,248.43 h100